# EAGLE board JD-RangeFinder - PCB v1 (EAGLE 9.7.0)
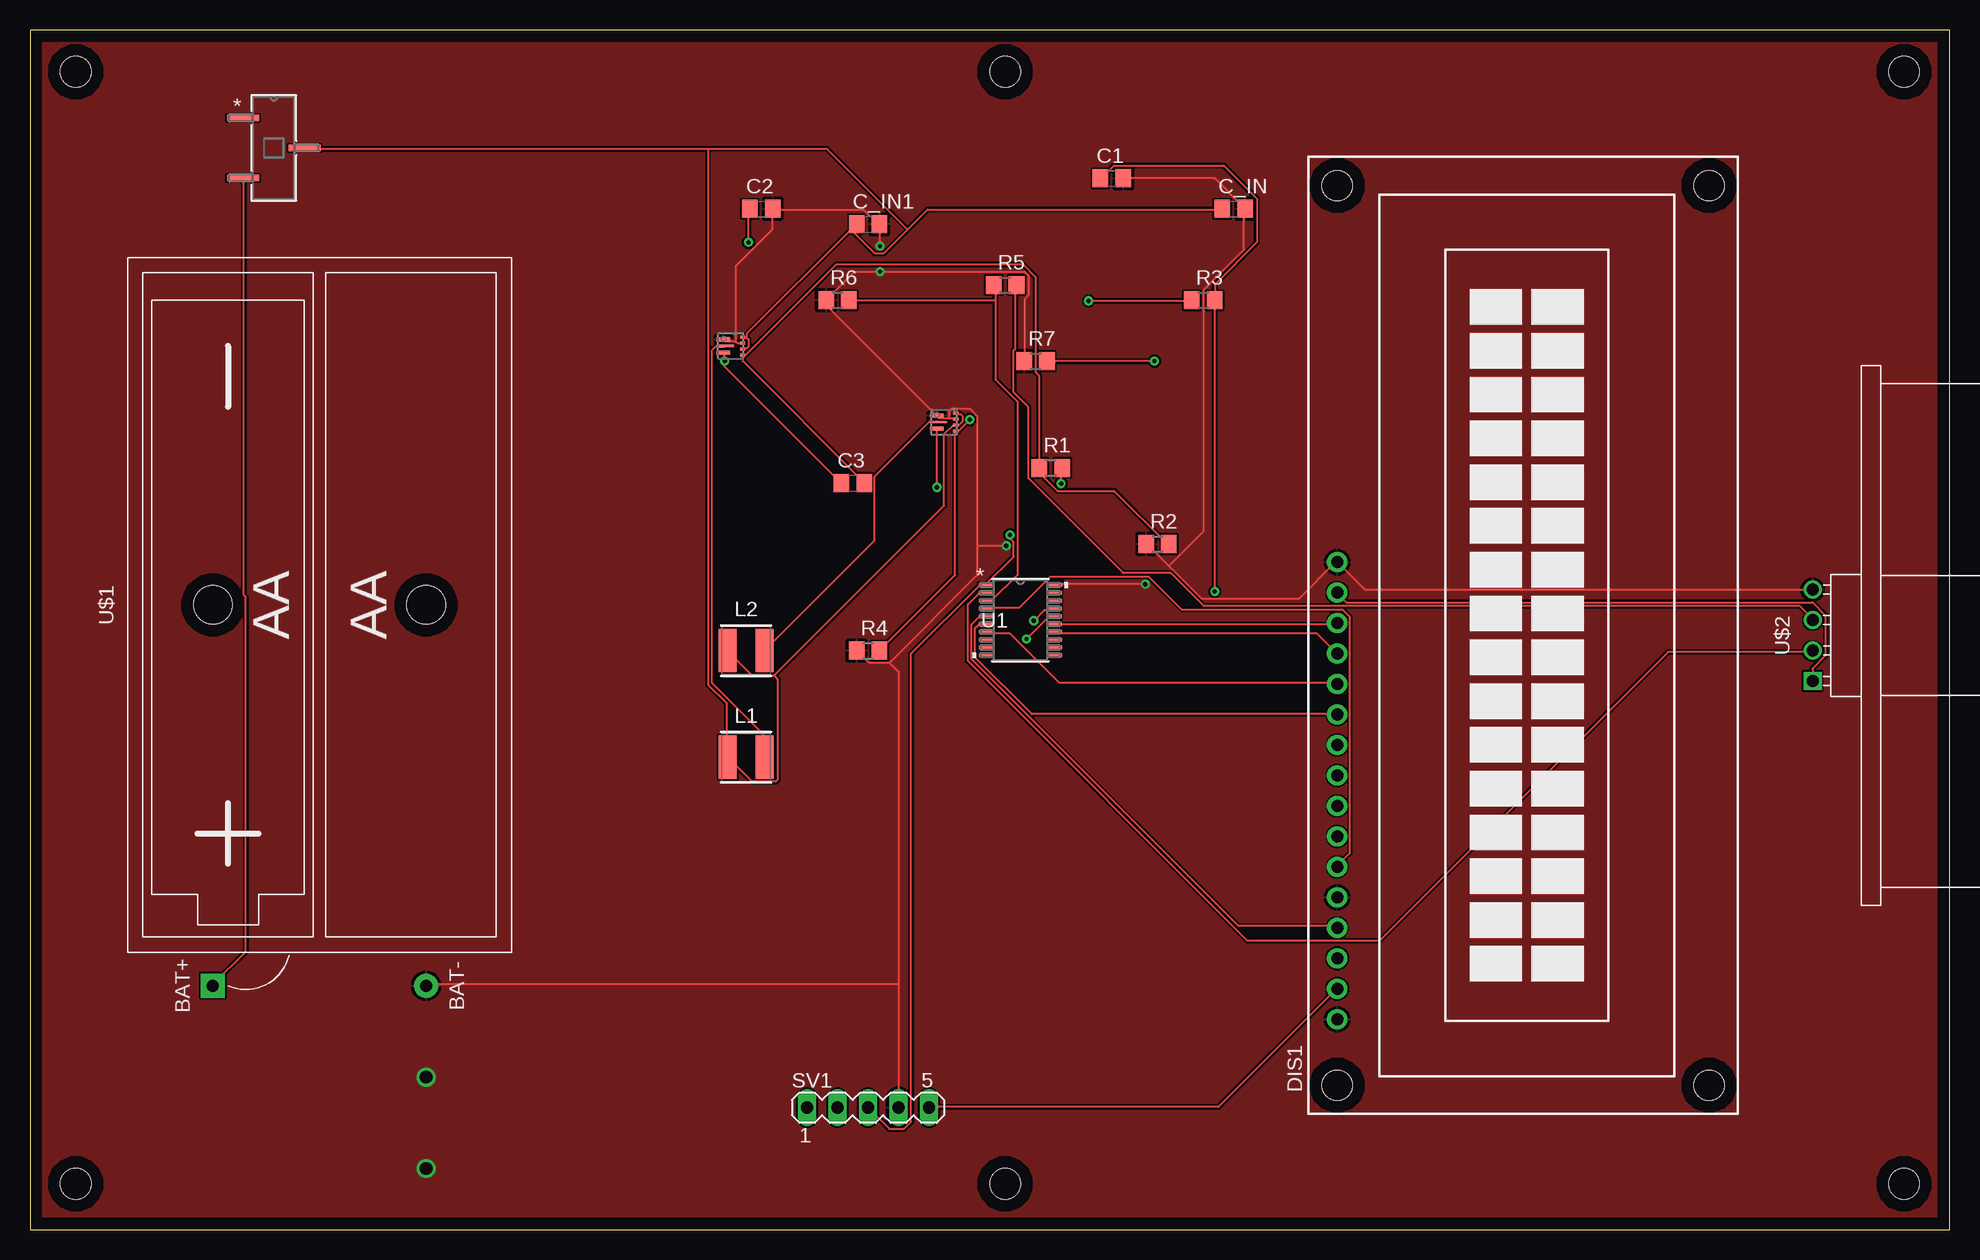
[diagram p0: board, top side]
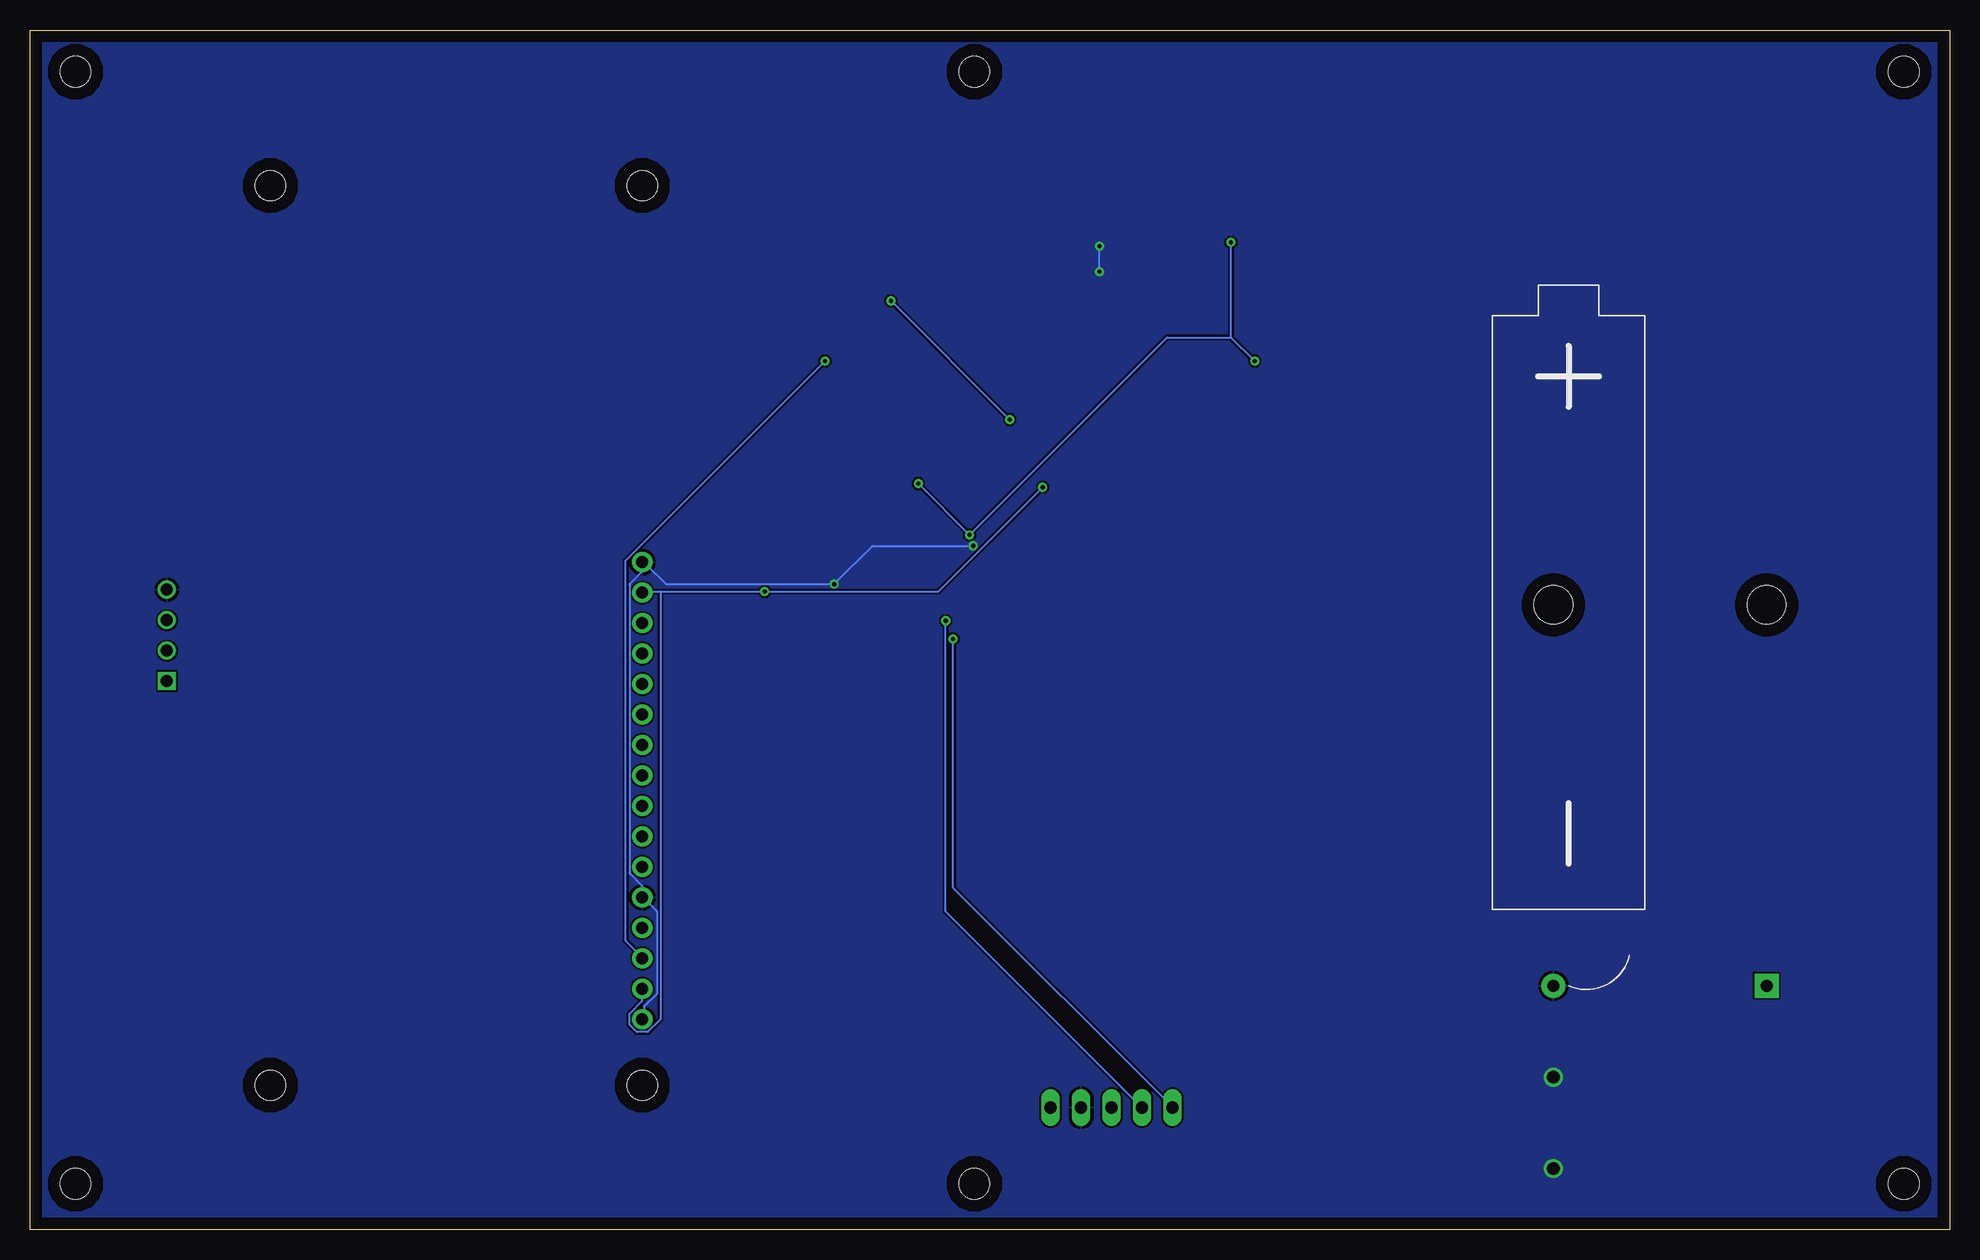
[diagram p1: board, bottom side, seen from below]

Size 160 x 100 mm. Coordinates in mm from the lower left corner, seen from the top.
Outline: 0,0 160,0 160,100 0,100 0,0
Copper layers (1*16): Top / Bottom
Stack-up Default Layer Stack: Top User Defined 0.035mm / Dielectric-1 User Defined 1.5mm / Bottom User Defined 0.035mm
Design rules: minimum copper width 6mil, minimum drill size 0.35mm, copper clearance wire_polygon to wire_polygon 6mil, copper clearance wire_polygon to pad_smd 6mil, copper clearance wire_polygon to via 6mil, copper clearance pad_smd to pad_smd 6mil, copper clearance pad_smd to via 6mil, copper clearance via to via 6mil, copper clearance smd to pad (same net) 6mil, copper clearance smd to via (same net) 6mil, copper clearance smd to smd (same net) 6mil, dimension clearance 40mil, restrict clearance 0mil, drill distance 6mil, keepout clearance 0mil
Holes 2.54 mm at 3.81,96.52 156.21,96.52 156.21,3.81 3.81,3.81 81.28,96.52 81.28,3.81

## Footprints (pad centres in the part's own frame; a part is rotated, then mirrored left to right if it is on the bottom)
RWU0007A = smd 1.15 x 0.35: 1 -0.625,0.55; 3 -0.625,-0.55 | smd 1.45 x 0.2: 2 -0.475,0 | smd 0.45 x 0.25: 4 0.975,-0.75; 5 0.975,-0.25; 6 0.975,0.25; 7 0.975,0.75
C0805 = smd 1.3 x 1.5: 1 -0.95,0; 2 0.95,0
TUXGR_16X2_R2 = drill 1 pad 1.676: 1 -32,15.5; 2 -29.46,15.5; 3 -26.92,15.5; 4 -24.38,15.5; 5 -21.84,15.5; 6 -19.3,15.5; 7 -16.76,15.5; 8 -14.22,15.5; 9 -11.68,15.5; 10 -9.14,15.5; 11 -6.6,15.5; 12 -4.06,15.5; 13 -1.52,15.5; 14 1.02,15.5; 15 3.56,15.5; 16 6.1,15.5 | hole 2.5: -37.5,-15.5; 37.5,-15.5; -37.5,15.5; 37.5,15.5
WE-LQS_4025 = smd 1.5 x 3.6: 1 -1.525,0; 2 1.525,0
SWITCH_1SCQN-L = smd 2.667 x 0.508: 1 -2.565,2.5; 2 2.565,0; 3 -2.565,-2.5
R0805 = smd 1.3 x 1.5: 1 -0.95,0; 2 0.95,0
MA05-1 = drill 1.016 long: 1 -5.08,0; 2 -2.54,0; 3 0,0; 4 2.54,0; 5 5.08,0
PW20-L = smd 1.168 x 0.305: 1 -2.87,2.925; 2 -2.87,2.275; 3 -2.87,1.625; 4 -2.87,0.975; 5 -2.87,0.325; 6 -2.87,-0.325; 7 -2.87,-0.975; 8 -2.87,-1.625; 9 -2.87,-2.275; 10 -2.87,-2.925; 11 2.87,-2.925; 12 2.87,-2.275; 13 2.87,-1.625; 14 2.87,-0.975; 15 2.87,-0.325; 16 2.87,0.325; 17 2.87,0.975; 18 2.87,1.625; 19 2.87,2.275; 20 2.87,2.925
BATTERY-HOLDER-2AA = drill 1 pad 2 square: BAT+ -31.75,8.89 | drill 1 pad 2: BAT- -31.75,-8.89 | hole 3.2: 0,8.89; 0,-8.89
ULTRASONIC-HC-SR04#V = drill 1 square: 1 -3.81,0 | drill 1: 2 -1.27,0; 3 1.27,0; 4 3.81,0

## Placement (x,y rotation side)
3.3VDIVIDER  TPS61022RWURRWU0007A  [RWU0007A]  58.42,73.66 0 top
5VDIVIDER  TPS61022RWURRWU0007A  [RWU0007A]  76.2,67.31 0 top
C1  22 uF  [C0805]  90.17,87.63 0 top
C2  15 uF  [C0805]  60.96,85.09 0 top
C3  1pF  [C0805]  68.58,62.23 0 top
C_IN  2.2 uF  [C0805]  100.33,85.09 0 top
C_IN1  10 uF  [C0805]  69.85,83.82 0 top
DIS1  TUXGR_16X2_R2  [TUXGR_16X2_R2]  124.46,49.53 90 top
L1  1uH  [WE-LQS_4025]  59.69,39.37 0 top
L2  1uH  [WE-LQS_4025]  59.69,48.26 0 top
ON/OFFSWITCH  JS102011SCQNSWITCH_1SCQN-L  [SWITCH_1SCQN-L]  20.32,90.17 0 top
R1  453 kOhms  [R0805]  85.09,63.5 0 top
R2  100 kOhms  [R0805]  93.98,57.15 0 top
R3  732 kOhms  [R0805]  97.79,77.47 0 top
R4  100 kOhms  [R0805]  69.85,48.26 0 top
R5  1k  [R0805]  81.28,78.74 0 top
R6  2k  [R0805]  67.31,77.47 0 top
R7  2k  [R0805]  83.82,72.39 0 top
SV1  [MA05-1]  69.85,10.16 0 top
U1  MSP430G2553IPW20RPW20-L  [PW20-L]  82.55,50.8 0 top
U$1  BATTERY-HOLDER-2AA  [BATTERY-HOLDER-2AA]  24.13,52.07 90 top
U$2  ULTRASONIC-HC-SR04#V  [ULTRASONIC-HC-SR04#V]  148.59,49.53 90 top

## Library data of the parts
3.3VDIVIDER 5VDIVIDER = DC-DC Switch; COPYRIGHT: Copyright (C) 2024 Ultra Librarian. All rights reserved.; MANUFACTURER_PART_NUMBER: TPS61022RWUR; MFR_NAME: Texas Instruments; REFDES: RefDes; TYPE: TYPE
C1-C3 C_IN C_IN1 = rcl; SPICEPREFIX: C
DIS1 = display-lcd; OC_FARNELL: unknown; OC_NEWARK: unknown
L1 L2 = Inductor 1uH 17mOhms; DATASHEET-URL: https://www.we-online.com/redexpert/spec/74404043010A?ae; FRES: 167MHz; IR: 4.9A; ISAT: 3.22A; PART-NUMBER: 74404043010A; RDC: 14mOhm
ON/OFFSWITCH = Slide Switch Library; COPYRIGHT: Copyright (C) 2024 Ultra Librarian. All rights reserved.; MANUFACTURER_PART_NUMBER: JS102011SCQN; MFR_NAME: C&K Components
R1-R7 = rcl; SPICEPREFIX: R
SV1 = con-lstb; OC_FARNELL: unknown; OC_NEWARK: unknown
U1 = JD-RangeFinder; COPYRIGHT: Copyright (C) 2024 Ultra Librarian. All rights reserved.; MANUFACTURER_PART_NUMBER: MSP430G2553IPW20R; MFR_NAME: Texas Instruments
U$1 U$2 = DIY-Modules Libraries

## Nets
3.3V: 3.3VDIVIDER.3 C2.1 C3.1 R1.2 SV1.3 U1.1
5V: 5VDIVIDER.3 C1.1 DIS1.2 DIS1.15 R3.2 SV1.5 U$2.1
GND: 3.3VDIVIDER.1 3.3VDIVIDER.6 5VDIVIDER.1 5VDIVIDER.6 C1.2 C2.2 C_IN1.2 C_IN.2 DIS1.1 DIS1.5 DIS1.16 R2.1 R4.1 R6.1 R7.1 SV1.4 U1.20 U$1.BAT- U$2.4
N$1: 3.3VDIVIDER.2 L1.2
N$3: U1.2 U$2.2
N$4: 3.3VDIVIDER.4 C3.2 R1.1 R2.2
N$6: 5VDIVIDER.2 L2.2
N$7: R5.1 R6.2 U1.3
N$9: 5VDIVIDER.4 R3.1 R4.2
N$11: R5.2 U$2.3
N$12: DIS1.6 U1.4
N$13: DIS1.4 U1.5
N$14: DIS1.11 U1.6
N$15: DIS1.12 U1.7
N$16: DIS1.13 U1.14
N$17: DIS1.14 U1.15
N$18: DIS1.3 R7.2
N$19: SV1.1 U1.16
N$20: SV1.2 U1.17
POWER_ON: 3.3VDIVIDER.5 3.3VDIVIDER.7 5VDIVIDER.5 5VDIVIDER.7 C_IN1.1 C_IN.1 L1.1 L2.1 ON/OFFSWITCH.2
POWER_OUT: ON/OFFSWITCH.3 U$1.BAT+

## Tracks (layer width: path | path; a pad name or v marks a point on that pad's centre or on a via)
3.3V  (via drill 0.35)
  Top 0.152: 3.3VDIVIDER.3 57.91,73 v57.91,72.39 57.91,71.93 67.51,62.33 C3.1 | v59.89,82.3 59.89,85.04 C2.1 | SV1.3 71.63,8.38 72.85,8.38 73.46,8.99 73.46,48.01 79.1,53.65 79.55,53.65 U1.1 79.7,53.8 81.99,56.08 81.99,57.3 81.69,57.61 v81.69,57.91 | v85.95,62.18 85.95,63.4 R1.2
  Bottom 0.152: 59.89,74.37 v59.89,82.3 | v57.91,72.39 59.89,74.37 | v85.95,62.18 v81.69,57.91 65.23,74.37 59.89,74.37
5V  (via drill 0.35)
  Top 0.152: SV1.5 74.98,10.21 99.06,10.21 108.81,19.96 DIS1.2 | C1.1 89.31,87.63 90.37,88.7 99.52,88.7 102.26,85.95 102.26,82.3 98.75,78.79 98.75,77.57 R3.2 98.75,77.42 v98.75,53.19 | v75.59,61.87 5VDIVIDER.3 | U$2.1 148.59,46.79 149.66,47.85 149.66,51.21 148.59,52.27 109.73,52.27 108.97,53.03 DIS1.15
  Bottom 0.152: v75.59,61.87 84.28,53.19 v98.75,53.19 107.44,53.19 | 107.44,53.19 108.81,53.19 DIS1.15 | 107.44,53.19 107.44,17.53 108.51,16.46 109.42,16.46 110.03,17.07 110.03,17.98 108.97,19.05 108.97,19.96 DIS1.2
GND  (via drill 0.35, 1.05)
  Top 0.152: 58.83,74.07 58.98,73.91 59.28,73.91 3.3VDIVIDER.6 | 58.83,74.07 57.91,74.07 3.3VDIVIDER.1 | 58.83,74.07 58.83,80.31 61.87,83.36 61.87,85.04 C2.2 62.03,85.04 69.49,85.04 70.71,83.82 C_IN1.2 70.87,83.82 v70.87,81.99 | 76.66,67.67 75.74,67.67 75.59,67.82 5VDIVIDER.1 75.44,67.97 66.45,76.96 66.45,77.42 R6.1 66.45,77.57 68.73,79.86 v70.87,79.86 82.91,79.86 83.21,79.55 83.21,77.88 82.91,77.57 82.91,72.39 R7.1 | 76.66,67.67 77.11,67.67 5VDIVIDER.6 | 71.63,47.24 69.95,47.24 69.04,48.16 R4.1 | 71.63,47.24 78.94,54.56 78.94,57 | 78.94,57 78.94,67.82 78.33,68.43 76.81,68.43 76.66,68.28 76.66,67.67 | 72.39,20.42 72.39,46.48 71.63,47.24 | 72.39,20.42 SV1.4 | 72.39,20.42 33.07,20.42 U$1.BAT- | C1.2 98.75,87.63 101.19,85.19 C_IN.2 101.19,85.04 101.19,81.69 97.84,78.33 97.84,58.22 94.94,55.32 | v92.96,53.8 85.5,53.8 U1.20 | 94.94,55.32 97.69,52.58 105.77,52.58 108.81,55.63 DIS1.16 111.25,53.34 U$2.4 | 94.94,55.32 93.12,57.15 R2.1 | v81.38,57 78.94,57
  Bottom 0.152: v70.87,79.86 v70.87,81.99 | DIS1.1 108.81,17.68 108.81,18.59 107.75,19.66 107.75,26.52 108.81,27.58 DIS1.5 108.97,27.74 108.97,28.65 110.03,29.72 110.03,53.8 108.51,55.32 | 108.51,55.32 108.81,55.63 DIS1.16 108.51,55.32 | 108.51,55.32 106.98,53.8 v92.96,53.8 89.76,57 v81.38,57
  other vias: 33.02,12.7 33.02,5.08
  pour Top: -3.81,101.6 161.29,101.6 161.29,-2.54 -3.81,-2.54
  pour Bottom: -1.27,101.6 161.29,101.6 161.29,-2.54 -1.27,-2.54
N$1
  Top 0.152: 3.3VDIVIDER.2 57.91,73.61 57.15,73.61 56.84,73.3 56.84,45.57 61.11,41.3 61.11,39.47 L1.2
N$3
  Top 0.152: U1.2 79.55,53.03 79.1,53.03 78.18,52.12 78.18,47.4 101.5,24.08 112.47,24.08 136.55,48.16 148.59,48.16 U$2.2
N$4
  Top 0.152: R2.2 94.79,57.15 90.37,61.57 85.65,61.57 84.28,62.94 84.28,63.4 R1.1 84.12,63.55 84.12,71.17 83.82,71.48 83.82,79.4 82.75,80.47 67.21,80.47 59.44,72.69 | 59.44,72.69 59.44,72.39 69.49,62.33 C3.2 | 59.44,72.69 59.44,72.85 3.3VDIVIDER.4
N$6
  Top 0.152: 5VDIVIDER.2 75.59,67.36 74.98,67.36 70.41,62.79 70.41,57.45 61.27,48.31 L2.2
N$7
  Top 0.152: 80.47,77.42 80.47,78.64 R5.1 | 80.47,77.42 80.47,70.87 82.3,69.04 82.3,54.56 80.16,52.43 79.7,52.43 U1.3 | 80.47,77.42 68.28,77.42 R6.2
N$9  (via drill 0.35)
  Top 0.152: R4.2 70.87,48.31 77.11,54.56 77.11,66.45 5VDIVIDER.4 77.27,66.45 v78.33,67.51 | v88.24,77.42 96.77,77.42 R3.1
  Bottom 0.152: v78.33,67.51 v88.24,77.42
N$11
  Top 0.152: R5.2 82.14,78.64 82.14,73.46 81.99,73.3 81.99,69.8 83.21,68.58 83.21,62.64 91.14,54.71 95.1,54.71 97.84,51.97 147.52,51.97 148.59,50.9 U$2.3
N$12
  Top 0.152: U1.4 79.7,51.82 82.45,51.82 85.04,54.41 93.27,54.41 96.01,51.66 109.42,51.66 110.03,51.05 110.03,31.39 108.97,30.33 DIS1.6
N$13
  Top 0.152: U1.5 79.55,51.05 79.1,51.05 78.49,50.44 78.49,47.55 100.74,25.3 108.81,25.3 DIS1.4
N$14
  Top 0.152: U1.6 79.55,50.44 79.1,50.44 78.79,50.14 78.79,47.7 83.52,42.98 108.81,42.98 DIS1.11
N$15
  Top 0.152: U1.7 79.7,49.68 81.69,49.68 85.8,45.57 108.81,45.57 DIS1.12
N$16
  Top 0.152: U1.14 85.5,49.68 107.29,49.68 108.81,48.16 DIS1.13
N$17
  Top 0.152: U1.15 85.5,50.44 108.81,50.44 DIS1.14
N$18  (via drill 0.35)
  Top 0.152: v93.73,72.39 R7.2
  Bottom 0.152: v93.73,72.39 110.34,55.78 110.34,24.08 108.97,22.71 DIS1.3
N$19  (via drill 0.35)
  Top 0.152: v83.06,49.23 84.89,51.05 85.34,51.05 U1.16
  Bottom 0.152: v83.06,49.23 83.06,28.5 64.77,10.21 SV1.1
N$20  (via drill 0.35)
  Top 0.152: v83.67,50.75 84.58,51.66 85.34,51.66 U1.17
  Bottom 0.152: v83.67,50.75 83.67,26.52 SV1.2
POWER_ON
  Top 0.152: 5VDIVIDER.7 77.27,67.97 77.57,67.97 77.72,67.82 77.72,67.36 77.42,67.06 77.27,67.06 5VDIVIDER.5 77.11,67.06 76.96,67.06 76.2,66.29 76.2,60.35 62.03,46.18 | 62.03,46.18 60.2,46.18 58.22,48.16 L2.1 | 62.03,46.18 62.33,45.87 62.33,37.49 62.18,37.34 60.2,37.34 58.22,39.32 L1.1 58.06,39.47 58.06,43.89 56.54,45.41 56.54,90.07 | 59.74,74.37 59.89,74.22 59.89,73.61 59.74,73.46 59.44,73.46 3.3VDIVIDER.5 | 59.74,74.37 59.44,74.37 3.3VDIVIDER.7 | 59.74,74.37 59.74,74.68 68.43,83.36 | 68.43,83.36 68.89,83.82 C_IN1.1 68.43,83.36 | 73.15,83.36 71.17,81.38 70.41,81.38 68.43,83.36 | 73.15,83.36 74.83,85.04 99.36,85.04 C_IN.1 | 56.54,90.07 66.45,90.07 73.15,83.36 | 56.54,90.07 23.01,90.07 ON/OFFSWITCH.2
POWER_OUT
  Top 0.152: ON/OFFSWITCH.3 17.83,87.63 17.83,52.88 17.98,52.73 17.98,23.16 15.24,20.42 U$1.BAT+